# EAGLE board MJoy16-C1_Key_Matrix (EAGLE 5.06)
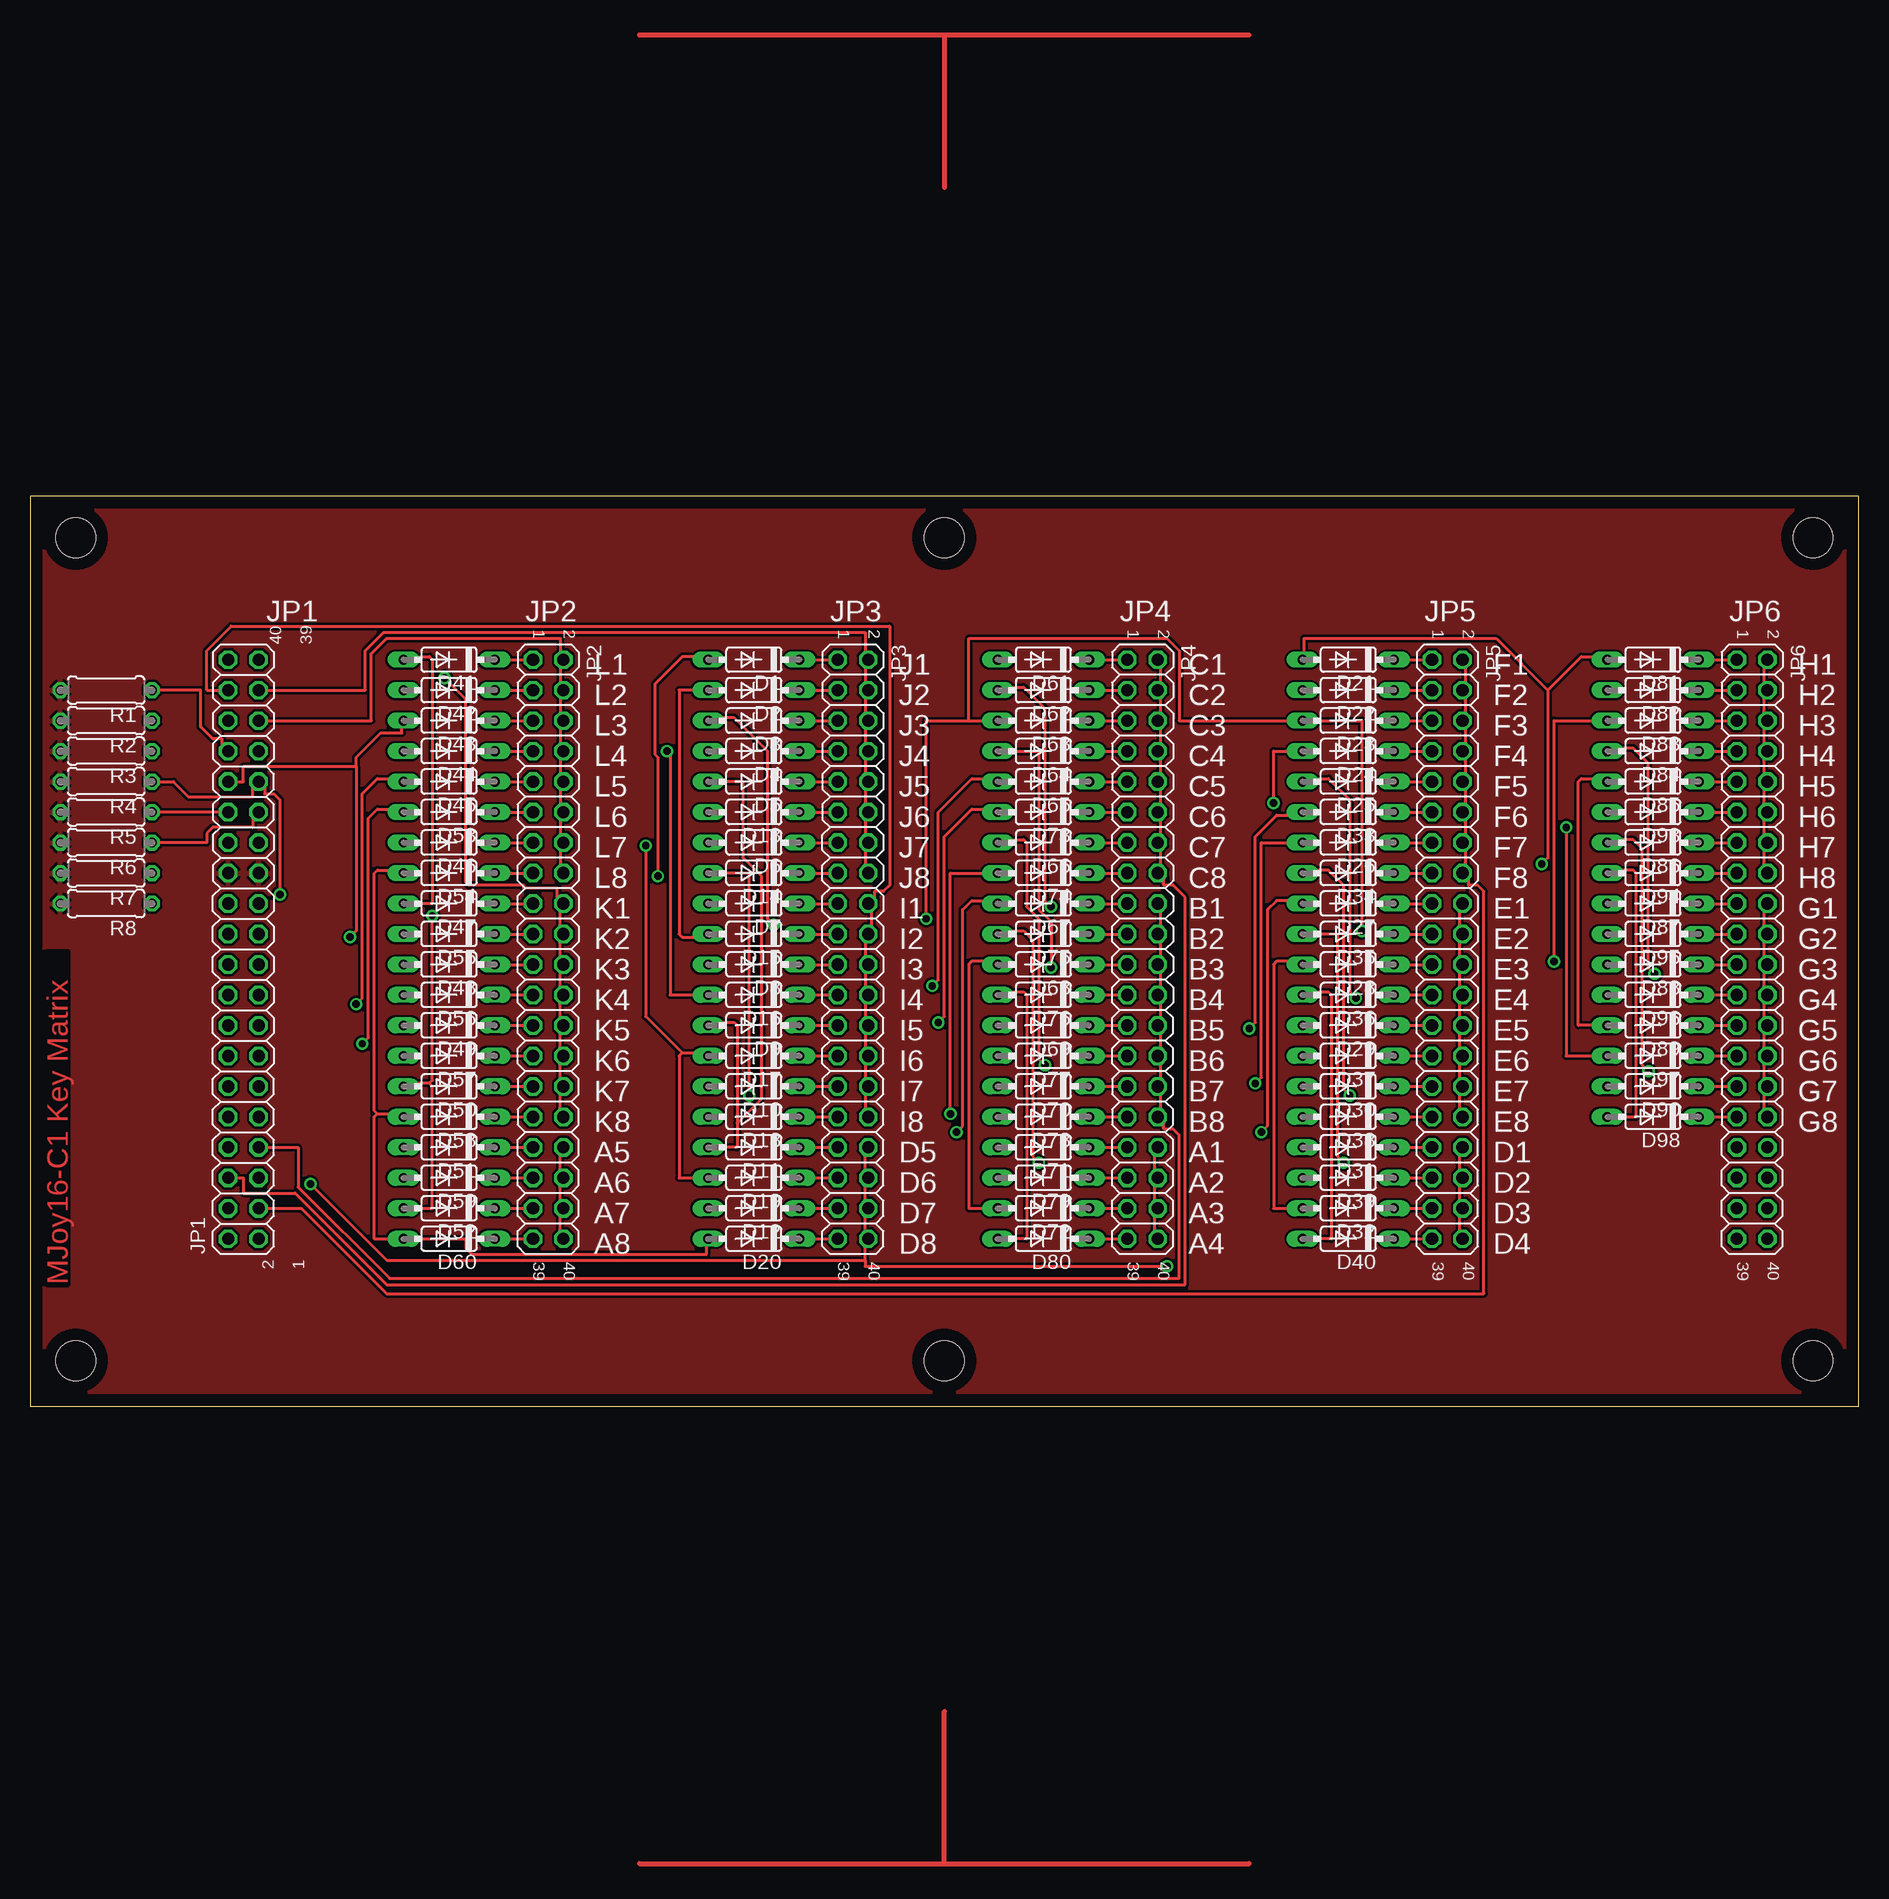
[diagram p0: board, top side]
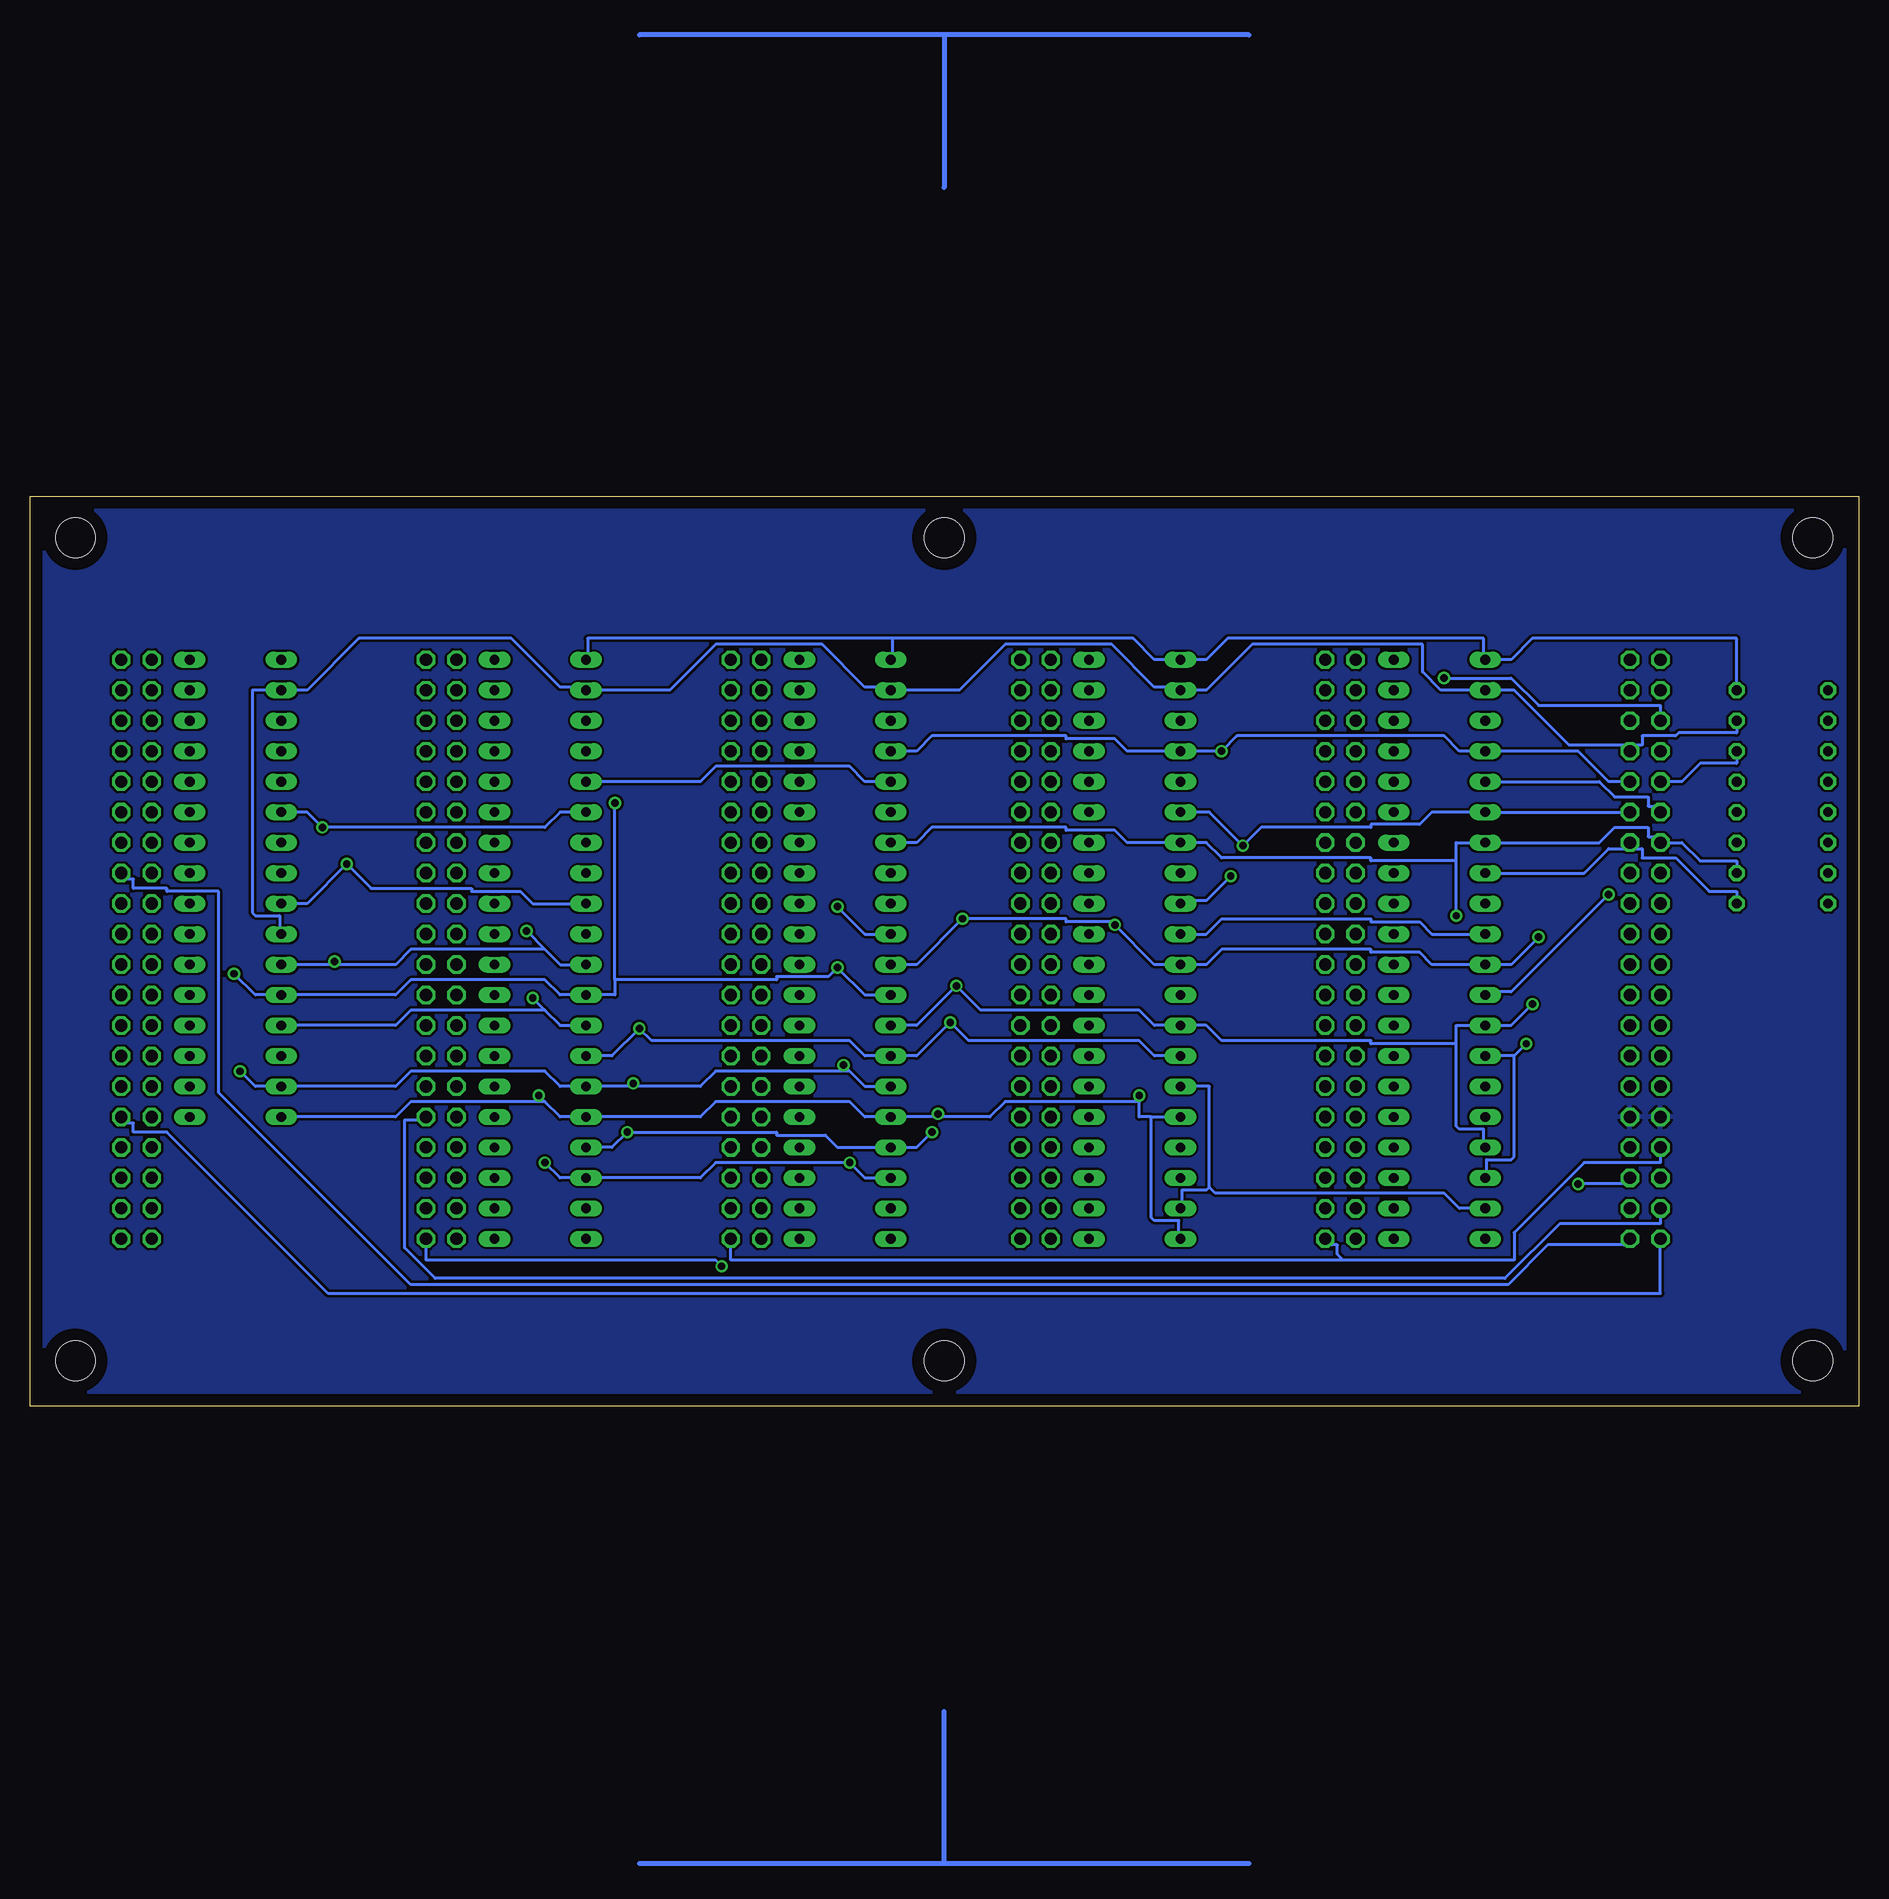
[diagram p1: board, bottom side, seen from below]

Size 152.38 x 75.87 mm. Coordinates in mm from the lower left corner, seen from the top.
Outline: 0,0 152.38,0 152.38,75.87 0,75.87 0,0
Copper layers (1*16): Top 0.035mm / dielectric 1.5mm / Bottom 0.035mm
Design rules "default": minimum track width 10mil, minimum drill 24mil, track to track 8mil, track to pad 8mil, pad to pad 8mil, via to via 8mil, smd to smd 8mil, copper to edge 40mil, drill to drill 8mil, minimum pad ring 10mil, minimum via ring 8mil, stop-mask expansion 4mil, vias tented up to drill 0mil, thermal gap 10mil

## Footprints (pad centres in the part's own frame; a part is rotated, then mirrored left to right if it is on the bottom)
DO35-7 = drill 0.813 long: A 3.81,0; C -3.81,0
2X20 = drill 1.016 octagon: 1 -24.13,-1.27; 2 -24.13,1.27; 3 -21.59,-1.27; 4 -21.59,1.27; 5 -19.05,-1.27; 6 -19.05,1.27; 7 -16.51,-1.27; 8 -16.51,1.27; 9 -13.97,-1.27; 10 -13.97,1.27; 11 -11.43,-1.27; 12 -11.43,1.27; 13 -8.89,-1.27; 14 -8.89,1.27; 15 -6.35,-1.27; 16 -6.35,1.27; 17 -3.81,-1.27; 18 -3.81,1.27; 19 -1.27,-1.27; 20 -1.27,1.27; 21 1.27,-1.27; 22 1.27,1.27; 23 3.81,-1.27; 24 3.81,1.27; 25 6.35,-1.27; 26 6.35,1.27; 27 8.89,-1.27; 28 8.89,1.27; 29 11.43,-1.27; 30 11.43,1.27; 31 13.97,-1.27; 32 13.97,1.27; 33 16.51,-1.27; 34 16.51,1.27; 35 19.05,-1.27; 36 19.05,1.27; 37 21.59,-1.27; 38 21.59,1.27; 39 24.13,-1.27; 40 24.13,1.27
0207/7 = drill 0.813 octagon: 1 -3.81,0; 2 3.81,0
STAND-OFF = hole 3.302: 0,0

## Placement (x,y rotation side)
D1  [DO35-7]  60.33,62.23 180 top
D2  [DO35-7]  60.33,59.69 180 top
D3  [DO35-7]  60.33,57.15 180 top
D4  [DO35-7]  60.33,54.61 180 top
D5  [DO35-7]  60.33,52.07 180 top
D6  [DO35-7]  60.33,46.99 180 top
D7  [DO35-7]  60.33,41.91 180 top
D8  [DO35-7]  60.33,36.83 180 top
D9  [DO35-7]  60.33,31.75 180 top
D10  [DO35-7]  60.33,26.67 180 top
D11  [DO35-7]  60.33,21.59 180 top
D12  [DO35-7]  60.33,16.51 180 top
D13  [DO35-7]  60.33,49.53 180 top
D14  [DO35-7]  60.33,44.45 180 top
D15  [DO35-7]  60.33,39.37 180 top
D16  [DO35-7]  60.33,34.29 180 top
D17  [DO35-7]  60.33,29.21 180 top
D18  [DO35-7]  60.33,24.13 180 top
D19  [DO35-7]  60.33,19.05 180 top
D20  [DO35-7]  60.33,13.97 180 top
D21  [DO35-7]  109.86,62.23 180 top
D22  [DO35-7]  109.86,59.69 180 top
D23  [DO35-7]  109.86,57.15 180 top
D24  [DO35-7]  109.86,54.61 180 top
D25  [DO35-7]  109.86,52.07 180 top
D26  [DO35-7]  109.86,46.99 180 top
D27  [DO35-7]  109.86,41.91 180 top
D28  [DO35-7]  109.86,36.83 180 top
D29  [DO35-7]  109.86,31.75 180 top
D30  [DO35-7]  109.86,26.67 180 top
D31  [DO35-7]  109.86,21.59 180 top
D32  [DO35-7]  109.86,16.51 180 top
D33  [DO35-7]  109.86,49.53 180 top
D34  [DO35-7]  109.86,44.45 180 top
D35  [DO35-7]  109.86,39.37 180 top
D36  [DO35-7]  109.86,34.29 180 top
D37  [DO35-7]  109.86,29.21 180 top
D38  [DO35-7]  109.86,24.13 180 top
D39  [DO35-7]  109.86,19.05 180 top
D40  [DO35-7]  109.86,13.97 180 top
D41  [DO35-7]  34.92,62.23 180 top
D42  [DO35-7]  34.92,59.69 180 top
D43  [DO35-7]  34.92,57.15 180 top
D44  [DO35-7]  34.92,54.61 180 top
D45  [DO35-7]  34.92,52.07 180 top
D46  [DO35-7]  34.92,46.99 180 top
D47  [DO35-7]  34.92,41.91 180 top
D48  [DO35-7]  34.92,36.83 180 top
D49  [DO35-7]  34.92,31.75 180 top
D50  [DO35-7]  34.92,26.67 180 top
D51  [DO35-7]  34.92,21.59 180 top
D52  [DO35-7]  34.92,16.51 180 top
D53  [DO35-7]  34.92,49.53 180 top
D54  [DO35-7]  34.92,44.45 180 top
D55  [DO35-7]  34.92,39.37 180 top
D56  [DO35-7]  34.92,34.29 180 top
D57  [DO35-7]  34.92,29.21 180 top
D58  [DO35-7]  34.92,24.13 180 top
D59  [DO35-7]  34.92,19.05 180 top
D60  [DO35-7]  34.92,13.97 180 top
D61  [DO35-7]  84.45,62.23 180 top
D62  [DO35-7]  84.45,59.69 180 top
D63  [DO35-7]  84.45,57.15 180 top
D64  [DO35-7]  84.45,54.61 180 top
D65  [DO35-7]  84.45,52.07 180 top
D66  [DO35-7]  84.45,46.99 180 top
D67  [DO35-7]  84.45,41.91 180 top
D68  [DO35-7]  84.45,36.83 180 top
D69  [DO35-7]  84.45,31.75 180 top
D70  [DO35-7]  84.45,26.67 180 top
D71  [DO35-7]  84.45,21.59 180 top
D72  [DO35-7]  84.45,16.51 180 top
D73  [DO35-7]  84.45,49.53 180 top
D74  [DO35-7]  84.45,44.45 180 top
D75  [DO35-7]  84.45,39.37 180 top
D76  [DO35-7]  84.45,34.29 180 top
D77  [DO35-7]  84.45,29.21 180 top
D78  [DO35-7]  84.45,24.13 180 top
D79  [DO35-7]  84.45,19.05 180 top
D80  [DO35-7]  84.45,13.97 180 top
D81  [DO35-7]  135.25,62.23 180 top
D82  [DO35-7]  135.25,59.69 180 top
D83  [DO35-7]  135.25,57.15 180 top
D84  [DO35-7]  135.25,54.61 180 top
D85  [DO35-7]  135.25,52.07 180 top
D86  [DO35-7]  135.25,46.99 180 top
D87  [DO35-7]  135.25,41.91 180 top
D88  [DO35-7]  135.25,36.83 180 top
D89  [DO35-7]  135.25,31.75 180 top
D90  [DO35-7]  135.25,26.67 180 top
D93  [DO35-7]  135.25,49.53 180 top
D94  [DO35-7]  135.25,44.45 180 top
D95  [DO35-7]  135.25,39.37 180 top
D96  [DO35-7]  135.25,34.29 180 top
D97  [DO35-7]  135.25,29.21 180 top
D98  [DO35-7]  135.25,24.13 180 top
JP1  [2X20]  17.78,38.1 90 top
JP2  [2X20]  43.18,38.1 270 top
JP3  [2X20]  68.58,38.1 270 top
JP4  [2X20]  92.71,38.1 270 top
JP5  [2X20]  118.11,38.1 270 top
JP6  [2X20]  143.51,38.1 270 top
R1  10K  [0207/7]  6.35,59.69 180 top
R2  10K  [0207/7]  6.35,57.15 180 top
R3  10K  [0207/7]  6.35,54.61 180 top
R4  10K  [0207/7]  6.35,52.07 180 top
R5  10K  [0207/7]  6.35,49.53 180 top
R6  10K  [0207/7]  6.35,46.99 180 top
R7  10K  [0207/7]  6.35,44.45 180 top
R8  10K  [0207/7]  6.35,41.91 180 top
U$1  [STAND-OFF]  3.81,3.81 0 top
U$2  [STAND-OFF]  3.81,72.39 0 top
U$3  [STAND-OFF]  148.59,3.81 0 top
U$4  [STAND-OFF]  148.59,72.39 0 top
U$5  [STAND-OFF]  76.2,72.39 0 top
U$6  [STAND-OFF]  76.2,3.81 0 top

## Library data of the parts
D1-D90 D93-D98 = diode
JP1-JP6 = pinhead
R1-R8 = resistor
U$1-U$6 = SparkFun

## Nets
GND: JP1.9 JP1.10
N$1: D1.C JP3.1
N$2: D2.C JP3.3
N$3: D3.C JP3.5
N$4: D4.C JP3.7
N$5: D5.C JP3.9
N$6: D13.C JP3.11
N$7: D6.C JP3.13
N$8: D14.C JP3.15
N$9: D7.C JP3.17
N$10: D15.C JP3.19
N$11: D8.C JP3.21
N$12: D16.C JP3.23
N$13: D9.C JP3.25
N$14: D17.C JP3.27
N$15: D10.C JP3.29
N$16: D18.C JP3.31
N$17: D11.C JP3.33
N$18: D19.C JP3.35
N$19: D12.C JP3.37
N$20: D20.C JP3.39
N$21: D41.C JP2.1
N$22: D21.C JP5.1
N$23: D22.C JP5.3
N$24: D23.C JP5.5
N$25: D24.C JP5.7
N$26: D25.C JP5.9
N$27: D33.C JP5.11
N$28: D26.C JP5.13
N$29: D34.C JP5.15
N$30: D27.C JP5.17
N$31: D35.C JP5.19
N$32: D28.C JP5.21
N$33: D36.C JP5.23
N$34: D29.C JP5.25
N$35: D37.C JP5.27
N$36: D30.C JP5.29
N$37: D38.C JP5.31
N$38: D31.C JP5.33
N$39: D39.C JP5.35
N$40: D32.C JP5.37
N$41: D40.C JP5.39
N$42: D42.C JP2.3
N$43: D43.C JP2.5
N$44: D44.C JP2.7
N$45: D45.C JP2.9
N$46: D53.C JP2.11
N$47: D46.C JP2.13
N$48: D54.C JP2.15
N$49: D47.C JP2.17
N$50: D55.C JP2.19
N$51: D48.C JP2.21
N$52: D56.C JP2.23
N$53: D49.C JP2.25
N$54: D57.C JP2.27
N$55: D50.C JP2.29
N$56: D58.C JP2.31
N$57: D51.C JP2.33
N$58: D59.C JP2.35
N$59: D52.C JP2.37
N$60: D60.C JP2.39
N$61: D61.C JP4.1
N$62: D62.C JP4.3
N$63: D63.C JP4.5
N$64: D64.C JP4.7
N$65: D65.C JP4.9
N$66: D73.C JP4.11
N$67: D66.C JP4.13
N$68: D74.C JP4.15
N$69: D67.C JP4.17
N$70: D75.C JP4.19
N$71: D68.C JP4.21
N$72: D76.C JP4.23
N$73: D69.C JP4.25
N$74: D77.C JP4.27
N$75: D70.C JP4.29
N$76: D78.C JP4.31
N$77: D71.C JP4.33
N$78: D79.C JP4.35
N$79: D72.C JP4.37
N$80: D80.C JP4.39
N$81: D81.C JP6.1
N$82: D82.C JP6.3
N$83: D83.C JP6.5
N$84: D84.C JP6.7
N$85: D85.C JP6.9
N$86: D93.C JP6.11
N$87: D86.C JP6.13
N$88: D94.C JP6.15
N$89: D87.C JP6.17
N$90: D95.C JP6.19
N$91: D88.C JP6.21
N$92: D96.C JP6.23
N$93: D89.C JP6.25
N$94: D97.C JP6.27
N$95: D90.C JP6.29
N$96: D98.C JP6.31
PB0: JP1.8 JP2.34 JP2.36 JP2.38 JP2.40 JP4.34 JP4.36 JP4.38 JP4.40
PB1: JP1.7 JP4.18 JP4.20 JP4.22 JP4.24 JP4.26 JP4.28 JP4.30 JP4.32
PB2: JP1.6 JP4.2 JP4.4 JP4.6 JP4.8 JP4.10 JP4.12 JP4.14 JP4.16
PB3: JP1.5 JP3.34 JP3.36 JP3.38 JP3.40 JP5.34 JP5.36 JP5.38 JP5.40
PB4: JP1.4 JP5.18 JP5.20 JP5.22 JP5.24 JP5.26 JP5.28 JP5.30 JP5.32
PB5: JP1.3 JP5.2 JP5.4 JP5.6 JP5.8 JP5.10 JP5.12 JP5.14 JP5.16
PB6: JP1.2 JP6.18 JP6.20 JP6.22 JP6.24 JP6.26 JP6.28 JP6.30 JP6.32
PB7: JP1.1 JP6.2 JP6.4 JP6.6 JP6.8 JP6.10 JP6.12 JP6.14 JP6.16
PC0: D1.A D7.A D21.A D27.A D31.A D41.A D47.A D61.A D67.A D71.A D81.A D87.A JP1.34 R1.1
PC1: D2.A D15.A D22.A D35.A D39.A D42.A D55.A D62.A D75.A D79.A D82.A D95.A JP1.33 R2.1
PC2: D3.A D8.A D23.A D28.A D32.A D43.A D48.A D63.A D68.A D72.A D83.A D88.A JP1.32 R3.1
PC3: D4.A D16.A D24.A D36.A D40.A D44.A D56.A D64.A D76.A D80.A D84.A D96.A JP1.31 R4.1
PC4: D5.A D9.A D11.A D25.A D29.A D45.A D49.A D51.A D65.A D69.A D85.A D89.A JP1.30 R5.1
PC5: D13.A D17.A D19.A D33.A D37.A D53.A D57.A D59.A D73.A D77.A D93.A D97.A JP1.29 R6.1
PC6: D6.A D10.A D12.A D26.A D30.A D46.A D50.A D52.A D66.A D70.A D86.A D90.A JP1.28 R7.1
PC7: D14.A D18.A D20.A D34.A D38.A D54.A D58.A D60.A D74.A D78.A D94.A D98.A JP1.27 R8.1
PD4: JP1.38 JP3.18 JP3.20 JP3.22 JP3.24 JP3.26 JP3.28 JP3.30 JP3.32
PD5: JP1.37 JP3.2 JP3.4 JP3.6 JP3.8 JP3.10 JP3.12 JP3.14 JP3.16
PD6: JP1.36 JP2.18 JP2.20 JP2.22 JP2.24 JP2.26 JP2.28 JP2.30 JP2.32
PD7: JP1.35 JP2.2 JP2.4 JP2.6 JP2.8 JP2.10 JP2.12 JP2.14 JP2.16
VCC: JP1.25 JP1.26 R1.2 R2.2 R3.2 R4.2 R5.2 R6.2 R7.2 R8.2

## Tracks (layer width: path | path; a pad name or v marks a point on that pad's centre or on a via)
GND
  pour Bottom: 0,0 152.4,0 152.4,76.2 0,76.2
N$1
  Top 0.254: JP3.1 64.26,62.23 D1.C
N$2
  Top 0.254: JP3.3 64.26,59.69 D2.C
N$3
  Top 0.254: JP3.5 64.26,57.15 D3.C
N$4
  Top 0.254: JP3.7 64.26,54.61 D4.C
N$5
  Top 0.254: JP3.9 64.26,52.07 D5.C
N$6
  Top 0.254: JP3.11 64.26,49.53 D13.C
N$7
  Top 0.254: JP3.13 64.26,46.99 D6.C
N$8
  Top 0.254: JP3.15 64.26,44.45 D14.C
N$9
  Top 0.254: JP3.17 64.26,41.91 D7.C
N$10
  Top 0.254: JP3.19 64.26,39.37 D15.C
N$11
  Top 0.254: JP3.21 64.26,36.83 D8.C
N$12
  Top 0.254: JP3.23 64.26,34.29 D16.C
N$13
  Top 0.254: JP3.25 64.26,31.75 D9.C
N$14
  Top 0.254: JP3.27 64.26,29.21 D17.C
N$15
  Top 0.254: JP3.29 64.26,26.67 D10.C
N$16
  Top 0.254: JP3.31 64.26,24.13 D18.C
N$17
  Top 0.254: JP3.33 64.26,21.59 D11.C
N$18
  Top 0.254: JP3.35 64.26,19.05 D19.C
N$19
  Top 0.254: JP3.37 64.26,16.51 D12.C
N$20
  Top 0.254: JP3.39 64.26,13.97 D20.C
N$21
  Top 0.254: JP2.1 38.86,62.23 D41.C
N$22
  Top 0.254: JP5.1 113.79,62.23 D21.C
N$23
  Top 0.254: JP5.3 113.79,59.69 D22.C
N$24
  Top 0.254: JP5.5 113.79,57.15 D23.C
N$25
  Top 0.254: JP5.7 113.79,54.61 D24.C
N$26
  Top 0.254: JP5.9 113.79,52.07 D25.C
N$27
  Top 0.254: JP5.11 113.79,49.53 D33.C
N$28
  Top 0.254: JP5.13 113.79,46.99 D26.C
N$29
  Top 0.254: JP5.15 113.79,44.45 D34.C
N$30
  Top 0.254: JP5.17 113.79,41.91 D27.C
N$31
  Top 0.254: JP5.19 113.79,39.37 D35.C
N$32
  Top 0.254: JP5.21 113.79,36.83 D28.C
N$33
  Top 0.254: JP5.23 113.79,34.29 D36.C
N$34
  Top 0.254: JP5.25 113.79,31.75 D29.C
N$35
  Top 0.254: JP5.27 113.79,29.21 D37.C
N$36
  Top 0.254: JP5.29 113.79,26.67 D30.C
N$37
  Top 0.254: JP5.31 113.79,24.13 D38.C
N$38
  Top 0.254: JP5.33 113.79,21.59 D31.C
N$39
  Top 0.254: JP5.35 113.79,19.05 D39.C
N$40
  Top 0.254: JP5.37 113.79,16.51 D32.C
N$41
  Top 0.254: JP5.39 113.79,13.97 D40.C
N$42
  Top 0.254: JP2.3 38.86,59.69 D42.C
N$43
  Top 0.254: JP2.5 38.86,57.15 D43.C
N$44
  Top 0.254: JP2.7 38.86,54.61 D44.C
N$45
  Top 0.254: JP2.9 38.86,52.07 D45.C
N$46
  Top 0.254: JP2.11 38.86,49.53 D53.C
N$47
  Top 0.254: JP2.13 38.86,46.99 D46.C
N$48
  Top 0.254: JP2.15 38.86,44.45 D54.C
N$49
  Top 0.254: JP2.17 38.86,41.91 D47.C
N$50
  Top 0.254: JP2.19 38.86,39.37 D55.C
N$51
  Top 0.254: JP2.21 38.86,36.83 D48.C
N$52
  Top 0.254: JP2.23 38.86,34.29 D56.C
N$53
  Top 0.254: JP2.25 38.86,31.75 D49.C
N$54
  Top 0.254: JP2.27 38.86,29.21 D57.C
N$55
  Top 0.254: JP2.29 38.86,26.67 D50.C
N$56
  Top 0.254: JP2.31 38.86,24.13 D58.C
N$57
  Top 0.254: JP2.33 38.86,21.59 D51.C
N$58
  Top 0.254: JP2.35 38.86,19.05 D59.C
N$59
  Top 0.254: JP2.37 38.86,16.51 D52.C
N$60
  Top 0.254: JP2.39 38.86,13.97 D60.C
N$61
  Top 0.254: JP4.1 88.39,62.23 D61.C
N$62
  Top 0.254: JP4.3 88.39,59.69 D62.C
N$63
  Top 0.254: JP4.5 88.39,57.15 D63.C
N$64
  Top 0.254: JP4.7 88.39,54.61 D64.C
N$65
  Top 0.254: JP4.9 88.39,52.07 D65.C
N$66
  Top 0.254: JP4.11 88.39,49.53 D73.C
N$67
  Top 0.254: JP4.13 88.39,46.99 D66.C
N$68
  Top 0.254: JP4.15 88.39,44.45 D74.C
N$69
  Top 0.254: JP4.17 88.39,41.91 D67.C
N$70
  Top 0.254: JP4.19 88.39,39.37 D75.C
N$71
  Top 0.254: JP4.21 88.39,36.83 D68.C
N$72
  Top 0.254: JP4.23 88.39,34.29 D76.C
N$73
  Top 0.254: JP4.25 88.39,31.75 D69.C
N$74
  Top 0.254: JP4.27 88.39,29.21 D77.C
N$75
  Top 0.254: JP4.29 88.39,26.67 D70.C
N$76
  Top 0.254: JP4.31 88.39,24.13 D78.C
N$77
  Top 0.254: JP4.33 88.39,21.59 D71.C
N$78
  Top 0.254: JP4.35 88.39,19.05 D79.C
N$79
  Top 0.254: JP4.37 88.39,16.51 D72.C
N$80
  Top 0.254: JP4.39 88.39,13.97 D80.C
N$81
  Top 0.254: JP6.1 139.19,62.23 D81.C
N$82
  Top 0.254: JP6.3 139.19,59.69 D82.C
N$83
  Top 0.254: JP6.5 139.19,57.15 D83.C
N$84
  Top 0.254: JP6.7 139.19,54.61 D84.C
N$85
  Top 0.254: JP6.9 139.19,52.07 D85.C
N$86
  Top 0.254: JP6.11 139.19,49.53 D93.C
N$87
  Top 0.254: JP6.13 139.19,46.99 D86.C
N$88
  Top 0.254: JP6.15 139.19,44.45 D94.C
N$89
  Top 0.254: JP6.17 139.19,41.91 D87.C
N$90
  Top 0.254: JP6.19 139.19,39.37 D95.C
N$91
  Top 0.254: JP6.21 139.19,36.83 D88.C
N$92
  Top 0.254: JP6.23 139.19,34.29 D96.C
N$93
  Top 0.254: JP6.25 139.19,31.75 D89.C
N$94
  Top 0.254: JP6.27 139.19,29.21 D97.C
N$95
  Top 0.254: JP6.29 139.19,26.67 D90.C
N$96
  Top 0.254: JP6.31 139.19,24.13 D98.C
N$97
  Top 0.406: 50.8,114.3 76.2,114.3 | 76.2,114.3 101.6,114.3 | 76.2,114.3 76.2,101.6
N$98
  Top 0.406: 50.8,-38.1 76.2,-38.1 | 76.2,-38.1 101.6,-38.1 | 76.2,-38.1 76.2,-25.4
N$99
  Bottom 0.406: 50.8,114.3 76.2,114.3 | 76.2,114.3 101.6,114.3 | 76.2,114.3 76.2,101.6
N$100
  Bottom 0.406: 50.8,-38.1 76.2,-38.1 | 76.2,-38.1 101.6,-38.1 | 76.2,-38.1 76.2,-25.4
PB0
  Top 0.254: JP4.40 93.73,14.22 93.73,16.26 | 93.73,16.26 JP4.38 93.73,16.26 | 93.73,18.8 JP4.36 93.73,18.8 | 93.73,16.26 93.73,18.8 | JP4.34 93.73,21.34 93.73,18.8 | JP2.40 44.2,14.22 44.2,16.26 | 44.2,16.26 JP2.38 44.2,16.26 | 44.2,18.8 JP2.36 44.2,18.8 | 44.2,16.26 44.2,18.8 | JP2.34 44.2,21.34 44.2,18.8
  Bottom 0.254: JP1.8 16.51,20.32 22.86,20.32 28.7,14.48 28.7,12.19 42.93,12.19 | 42.93,12.19 43.43,12.7 43.43,13.46 43.94,13.46 JP2.40 | JP4.40 93.98,12.19 42.93,12.19
PB1
  Top 0.254: JP1.7 22.35,21.59 22.35,18.29 29.97,10.67 95.76,10.67 95.76,22.61 95.25,23.11 94.49,23.11 94.49,23.62 94.23,23.88 | 94.23,23.88 JP4.32 94.23,23.88 | 94.23,26.42 JP4.30 94.23,26.42 | 94.23,23.88 94.23,26.42 | 94.23,28.96 JP4.28 94.23,28.96 | 94.23,26.42 94.23,28.96 | 94.23,31.5 JP4.26 94.23,31.5 | 94.23,28.96 94.23,31.5 | 94.23,34.04 JP4.24 94.23,34.04 | 94.23,31.5 94.23,34.04 | 94.23,36.58 JP4.22 94.23,36.58 | 94.23,34.04 94.23,36.58 | 94.23,39.12 JP4.20 94.23,39.12 | 94.23,36.58 94.23,39.12 | JP4.18 94.23,41.66 94.23,39.12
PB2
  Top 0.254: JP1.6 17.78,19.05 17.78,17.78 22.1,17.78 29.72,10.16 96.27,10.16 96.27,42.42 95.25,43.43 94.49,43.43 94.49,43.94 94.23,44.2 | 94.23,44.2 JP4.16 94.23,44.2 | 94.23,46.74 JP4.14 94.23,46.74 | 94.23,44.2 94.23,46.74 | 94.23,49.28 JP4.12 94.23,49.28 | 94.23,46.74 94.23,49.28 | 94.23,51.82 JP4.10 94.23,51.82 | 94.23,49.28 94.23,51.82 | 94.23,54.36 JP4.8 94.23,54.36 | 94.23,51.82 94.23,54.36 | 94.23,56.9 JP4.6 94.23,56.9 | 94.23,54.36 94.23,56.9 | 94.23,59.44 JP4.4 94.23,59.44 | 94.23,56.9 94.23,59.44 | JP4.2 94.23,61.98 94.23,59.44
PB3  (via drill 0.61)
  Top 0.254: JP5.40 119.13,14.22 119.13,16.26 | 119.13,16.26 JP5.38 119.13,16.26 | 119.13,18.8 JP5.36 119.13,18.8 | 119.13,16.26 119.13,18.8 | JP5.34 119.13,21.34 119.13,18.8 | 69.6,14.22 JP3.40 69.6,14.22 | 69.6,14.22 69.6,16.26 | 69.6,16.26 JP3.38 69.6,16.26 | v23.37,18.54 29.72,12.19 69.6,12.19 | 69.6,12.19 69.6,14.22 | 69.6,18.8 JP3.36 69.6,18.8 | 69.6,16.26 69.6,18.8 | JP3.34 69.6,21.34 69.6,18.8 | v94.74,11.68 69.6,11.68 69.6,12.19
  Bottom 0.254: JP1.5 19.56,18.54 v23.37,18.54 | JP5.40 119.38,12.19 95.25,12.19 v94.74,11.68
PB4
  Top 0.254: 119.13,28.96 119.13,26.92 JP5.30 119.13,26.42 119.13,24.38 JP5.32 | 119.13,28.96 JP5.28 119.13,28.96 | 119.13,31.5 JP5.26 119.13,31.5 | 119.13,28.96 119.13,31.5 | 119.13,34.04 JP5.24 119.13,34.04 | 119.13,31.5 119.13,34.04 | 119.13,36.58 JP5.22 119.13,36.58 | 119.13,34.04 119.13,36.58 | 119.13,39.12 JP5.20 119.13,39.12 | 119.13,36.58 119.13,39.12 | JP5.18 119.13,41.66 119.13,39.12
  Bottom 0.254: JP1.4 16.51,15.24 24.89,15.24 29.46,10.67 118.62,10.67 121.16,13.21 121.16,23.88 119.63,23.88 JP5.32
PB5
  Top 0.254: JP1.3 22.61,16.51 29.72,9.4 121.16,9.4 121.16,42.93 120.65,43.43 119.89,43.43 119.89,43.94 119.63,44.2 | 119.63,44.2 JP5.16 119.63,44.2 | 119.63,46.74 JP5.14 119.63,46.74 | 119.63,44.2 119.63,46.74 | 119.63,49.28 JP5.12 119.63,49.28 | 119.63,46.74 119.63,49.28 | 119.63,51.82 JP5.10 119.63,51.82 | 119.63,49.28 119.63,51.82 | 119.63,54.36 JP5.8 119.63,54.36 | 119.63,51.82 119.63,54.36 | 119.63,56.9 JP5.6 119.63,56.9 | 119.63,54.36 119.63,56.9 | 119.63,59.44 JP5.4 119.63,59.44 | 119.63,56.9 119.63,59.44 | JP5.2 119.63,61.98 119.63,59.44
PB6
  Top 0.254: 144.53,28.96 144.53,26.92 JP6.30 144.53,26.42 144.53,24.38 JP6.32 | 144.53,28.96 JP6.28 144.53,28.96 | 144.53,31.5 JP6.26 144.53,31.5 | 144.53,28.96 144.53,31.5 | 144.53,34.04 JP6.24 144.53,34.04 | 144.53,31.5 144.53,34.04 | 144.53,36.58 JP6.22 144.53,36.58 | 144.53,34.04 144.53,36.58 | 144.53,39.12 JP6.20 144.53,39.12 | 144.53,36.58 144.53,39.12 | JP6.18 144.53,41.66 144.53,39.12
  Bottom 0.254: JP1.2 16.51,9.4 127.51,9.4 140.97,22.86 143.76,22.86 143.76,23.62 144.27,23.62 JP6.32
PB7
  Top 0.254: 144.53,49.28 144.53,47.24 JP6.14 144.53,46.74 144.53,44.7 JP6.16 | 144.53,49.28 JP6.12 144.53,49.28 | 144.53,51.82 JP6.10 144.53,51.82 | 144.53,49.28 144.53,51.82 | 144.53,54.36 JP6.8 144.53,54.36 | 144.53,51.82 144.53,54.36 | 144.53,56.9 JP6.6 144.53,56.9 | 144.53,54.36 144.53,56.9 | 144.53,59.44 JP6.4 144.53,59.44 | 144.53,56.9 144.53,59.44 | JP6.2 144.53,61.98 144.53,59.44
  Bottom 0.254: JP1.1 19.56,13.46 25.91,13.46 29.21,10.16 120.65,10.16 136.65,26.16 136.65,42.93 140.97,42.93 140.97,43.18 143.76,43.18 143.76,43.94 144.27,43.94 JP6.16
PC0  (via drill 0.61)
  Top 0.254: v77.22,22.86 77.72,23.37 77.72,41.4 78.49,42.16 80.52,42.16 80.52,41.91 D67.A | v102.62,22.86 103.12,23.37 103.12,41.4 103.89,42.16 105.92,42.16 105.92,41.91 D27.A | R1.1 14.22,59.69 14.22,56.64 15.24,55.63 16,55.63 16,55.12 JP1.34 | D47.A 31.24,41.91 33.53,41.91 33.53,62.23 33.27,62.48 31.24,62.48 31.24,62.23 D41.A | v125.98,45.21 126.49,45.72 126.49,59.69 | 126.49,59.69 129.29,62.48 131.32,62.48 131.32,62.23 D81.A | v52.32,44.2 52.32,54.1 52.07,54.36 52.07,60.2 54.36,62.48 56.39,62.48 56.39,62.23 D1.A | 126.49,59.69 122.17,64.01 106.17,64.01 106.17,62.23 D21.A
  Bottom 0.254: v77.22,22.86 78.49,21.59 80.52,21.59 D71.A 80.77,21.59 85.09,21.59 86.11,22.61 90.17,22.61 90.17,22.86 v102.62,22.86 103.89,21.59 105.92,21.59 D31.A | R1.1 10.16,64.01 27.18,64.01 28.96,62.23 30.99,62.23 D41.A 31.24,62.23 31.24,64.01 52.58,64.01 54.36,62.23 56.39,62.23 D1.A 56.64,62.23 58.67,62.23 60.45,64.01 80.52,64.01 | D87.A 131.32,41.91 129.29,41.91 v125.98,45.21 123.95,43.18 115.57,43.18 115.57,42.93 111.51,42.93 110.49,41.91 106.17,41.91 D27.A | v52.32,44.2 54.36,42.16 56.13,42.16 56.39,41.91 D7.A | 80.52,64.01 80.52,62.23 D61.A | 80.52,64.01 105.92,64.01 105.92,62.23 D21.A
PC1  (via drill 0.61)
  Top 0.254: v84.07,20.32 83.57,20.83 83.57,38.86 82.8,39.62 80.77,39.62 80.77,39.37 D75.A | v109.47,20.32 108.97,20.83 108.97,39.37 106.17,39.37 D35.A | D2.A 56.39,59.69 54.1,59.69 54.1,39.37 54.36,39.12 56.39,39.12 56.39,39.37 D15.A | v85.09,41.66 84.58,42.16 84.58,58.17 82.8,59.94 80.77,59.94 80.77,59.69 D62.A
  Bottom 0.254: D95.A 131.57,39.37 131.57,40.89 133.6,40.89 133.86,41.15 133.86,59.69 131.57,59.69 D82.A 131.32,59.69 129.29,59.69 124.97,64.01 112.27,64.01 108.2,59.94 106.43,59.94 106.17,59.69 D22.A 105.92,59.69 99.06,59.69 95.25,63.5 86.36,63.5 82.8,59.94 81.03,59.94 80.77,59.69 D62.A 80.52,59.69 74.93,59.69 71.12,63.5 62.23,63.5 58.67,59.94 56.9,59.94 56.64,59.69 D2.A 56.39,59.69 54.36,59.69 50.55,63.5 36.32,63.5 36.32,61.21 34.8,59.69 31.24,59.69 D42.A 30.99,59.69 28.7,59.69 24.13,55.12 18.54,55.12 | D79.A 80.77,19.05 82.8,19.05 v84.07,20.32 95.25,20.32 96.52,19.05 105.92,19.05 D39.A 106.17,19.05 108.2,19.05 v109.47,20.32 | R2.1 10.16,56.13 14.99,56.13 15.24,55.88 18.03,55.88 18.03,55.12 18.54,55.12 | 18.54,55.12 JP1.33 18.54,55.12 | D55.A 31.24,39.37 35.56,39.37 36.58,40.39 40.64,40.39 40.64,40.64 53.09,40.64 54.36,39.37 56.39,39.37 D15.A | v85.09,41.66 82.8,39.37 80.77,39.37 D75.A
PC2  (via drill 0.61)
  Top 0.254: D32.A 105.92,16.51 103.63,16.51 103.63,36.83 103.89,37.08 105.92,37.08 105.92,36.83 D28.A | v111,39.62 111,57.15 106.17,57.15 D23.A 105.92,57.15 95.76,57.15 95.76,62.99 94.74,64.01 78.23,64.01 78.23,57.15 | v127,37.08 127,57.15 131.32,57.15 D83.A | v26.67,39.12 27.18,39.62 27.18,53.34 | 27.18,53.34 27.18,54.1 29.21,56.13 30.99,56.13 30.99,57.15 D43.A | JP1.32 17.78,52.07 17.78,53.34 27.18,53.34 | v61.98,40.13 61.47,40.64 61.47,54.61 58.67,57.4 56.64,57.4 56.64,57.15 D3.A | D72.A 80.52,16.51 78.23,16.51 78.23,36.83 78.49,37.08 80.52,37.08 80.52,36.83 D68.A | 78.23,57.15 74.68,57.15 v74.68,40.64 | 78.23,57.15 80.52,57.15 D63.A
  Bottom 0.254: 109.47,38.1 108.2,36.83 106.17,36.83 D28.A | v111,39.62 109.47,38.1 | 127,36.83 121.92,36.83 120.65,38.1 109.47,38.1 | 127,36.83 131.32,36.83 D88.A | 127,36.83 v127,37.08 | R3.1 10.16,53.59 13.21,53.59 14.73,52.07 JP1.32 | v26.67,39.12 28.96,36.83 30.99,36.83 D48.A 31.24,36.83 35.56,36.83 36.58,37.85 40.64,37.85 40.64,38.1 53.09,38.1 54.36,36.83 56.39,36.83 D8.A 56.64,36.83 58.67,36.83 v61.98,40.13 61.98,40.39 66.04,40.39 66.04,40.64 v74.68,40.64 78.49,36.83 80.52,36.83 D68.A
PC3  (via drill 0.61)
  Top 0.254: v53.09,54.61 53.34,54.36 53.34,34.29 56.39,34.29 D16.A | v20.83,42.67 20.83,50.55 20.32,51.05 19.56,51.05 19.56,51.56 JP1.31 18.54,51.56 18.54,50.8 13.21,50.8 11.94,52.07 R4.1 | D80.A 80.77,13.97 83.06,13.97 83.06,34.29 82.8,34.54 80.77,34.54 80.77,34.29 D76.A | v85.09,36.58 85.09,40.39 84.07,41.4 84.07,54.61 80.77,54.61 D64.A | v135.38,36.07 134.87,36.58 134.87,53.59 133.6,54.86 131.57,54.86 131.57,54.61 D84.A | D40.A 106.17,13.97 108.46,13.97 108.46,34.29 108.2,34.54 106.17,34.54 106.17,34.29 D36.A | v103.63,50.29 103.63,54.61 105.92,54.61 D24.A
  Bottom 0.254: v20.83,42.67 28.96,34.54 30.73,34.54 30.99,34.29 D56.A | JP1.31 20.83,52.07 23.37,54.61 30.99,54.61 D44.A 31.24,54.61 33.27,54.61 34.54,55.88 51.82,55.88 v53.09,54.61 56.39,54.61 D4.A 56.64,54.61 60.96,54.61 61.98,55.63 66.04,55.63 66.04,55.88 77.22,55.88 78.49,54.61 80.52,54.61 D64.A | D76.A 80.77,34.29 82.8,34.29 v85.09,36.58 85.85,35.81 90.17,35.81 90.17,35.56 103.63,35.56 | v135.38,36.07 133.6,34.29 131.57,34.29 D96.A 131.32,34.29 121.92,34.29 120.65,35.56 109.47,35.56 108.2,34.29 106.17,34.29 D36.A 105.92,34.29 103.63,34.29 103.63,35.56 | 103.63,35.56 v103.63,50.29
PC4  (via drill 0.61)
  Top 0.254: JP1.30 R5.1 | v27.18,33.53 27.69,34.04 27.69,51.05 28.96,52.32 30.99,52.32 30.99,52.07 D45.A | D89.A 131.32,31.75 129.03,31.75 129.03,52.07 129.29,52.32 131.32,52.32 131.32,52.07 D85.A | v110.49,34.04 109.98,34.54 109.98,50.55 108.2,52.32 106.17,52.32 106.17,52.07 D25.A | v75.18,35.05 75.69,35.56 75.69,49.53 78.49,52.32 80.52,52.32 80.52,52.07 D65.A | 58.93,23.62 58.93,31.75 58.67,32 56.64,32 56.64,31.75 D9.A | 58.93,23.62 58.93,21.59 56.64,21.59 D11.A | 58.93,23.62 60.96,25.65 60.96,44.2 59.44,45.72 59.44,52.07 56.64,52.07 D5.A
  Bottom 0.254: 33.53,30.23 33.53,31.75 31.24,31.75 D49.A 30.99,31.75 28.96,31.75 v27.18,33.53 | 33.53,30.23 33.53,23.37 33.27,23.11 31.24,23.11 31.24,21.59 D51.A | JP1.30 17.02,50.04 17.53,50.04 17.53,50.8 20.32,50.8 21.59,52.07 30.99,52.07 D45.A | v110.49,34.04 109.47,33.02 | 109.47,33.02 108.2,31.75 106.17,31.75 D29.A | 109.47,33.02 120.65,33.02 121.92,31.75 131.32,31.75 D89.A | D69.A 80.52,31.75 78.49,31.75 v75.18,35.05 73.15,33.02 59.94,33.02 58.67,31.75 56.64,31.75 D9.A 56.39,31.75 54.36,31.75 53.09,30.48 40.64,30.48 40.64,30.23 33.53,30.23 | D25.A 105.92,52.07 96.52,52.07 95.25,53.34 84.07,53.34 82.8,52.07 80.77,52.07 D65.A
PC5  (via drill 0.61)
  Top 0.254: R6.1 14.73,46.99 14.73,47.75 15.24,48.26 18.54,48.26 18.54,49.02 JP1.29 | v27.69,30.23 28.19,30.73 28.19,49.02 28.96,49.78 30.99,49.78 30.99,49.53 D53.A | v128.02,48.26 128.02,29.21 131.32,29.21 D97.A | v101.6,31.5 102.11,32 102.11,47.5 103.89,49.28 105.92,49.28 105.92,49.53 D33.A | v75.69,32 76.2,32.51 76.2,47.5 78.49,49.78 80.52,49.78 80.52,49.53 D73.A | 54.36,29.46 54.1,29.21 54.1,19.05 56.39,19.05 D19.A | 54.36,29.46 56.39,29.46 56.39,29.21 D17.A | v51.31,46.74 51.31,32.51 54.36,29.46
  Bottom 0.254: 28.7,29.21 28.7,20.83 28.96,20.57 30.99,20.57 30.99,19.05 D59.A | 28.7,29.21 30.99,29.21 D57.A | JP1.29 30.99,49.53 D53.A 31.24,49.53 35.56,49.53 36.58,48.51 40.64,48.51 40.64,48.26 49.78,48.26 v51.31,46.74 54.1,49.53 56.39,49.53 D13.A | 28.7,29.21 v27.69,30.23 | D93.A 131.32,49.53 129.29,49.53 v128.02,48.26 109.47,48.26 108.2,49.53 106.17,49.53 D33.A | D37.A 105.92,29.21 103.89,29.21 v101.6,31.5 100.58,30.48 84.07,30.48 82.8,29.21 80.77,29.21 D77.A 80.52,29.21 78.49,29.21 v75.69,32 74.17,30.48 59.94,30.48 58.67,29.21 56.64,29.21 D17.A
PC6  (via drill 0.61)
  Top 0.254: 33.27,26.92 33.53,26.67 33.53,16.51 31.24,16.51 D52.A | 33.27,26.92 31.24,26.92 31.24,26.67 D50.A | 33.27,26.92 33.53,27.18 v33.53,40.89 | v134.87,27.94 134.37,28.45 134.37,46.48 133.6,47.24 131.57,47.24 131.57,46.99 D86.A | v84.58,28.45 84.07,28.96 84.07,40.64 83.06,41.66 83.06,46.99 82.8,47.24 80.77,47.24 80.77,46.99 D66.A | v102.11,26.92 102.62,27.43 102.62,46.99 105.92,46.99 D26.A
  Bottom 0.254: 54.1,18.29 54.36,18.03 56.39,18.03 56.39,16.51 D12.A | 54.1,18.29 54.1,26.67 56.39,26.67 D10.A | R7.1 10.16,45.47 13.21,45.47 14.73,46.99 JP1.28 17.02,47.5 17.53,47.5 17.53,48.26 20.32,48.26 21.59,46.99 30.99,46.99 D46.A 31.24,46.99 33.53,46.99 33.53,45.47 | v33.53,40.89 33.53,45.47 | 54.1,18.29 53.59,17.78 34.54,17.78 33.27,16.51 31.24,16.51 D52.A | v134.87,27.94 133.6,26.67 131.57,26.67 D90.A 131.32,26.67 121.92,26.67 120.65,27.94 109.47,27.94 108.2,26.67 106.17,26.67 D30.A 105.92,26.67 102.11,26.67 | v84.58,28.45 84.07,27.94 | 84.07,27.94 82.8,26.67 80.77,26.67 D70.A | 102.11,26.67 96.52,26.67 95.25,27.94 84.07,27.94 | D66.A 80.52,46.99 78.49,46.99 77.22,48.26 66.04,48.26 66.04,48.01 61.98,48.01 60.96,46.99 56.64,46.99 D6.A 56.39,46.99 54.36,46.99 53.09,45.72 40.64,45.72 40.64,45.47 33.53,45.47 | 102.11,26.67 v102.11,26.92
PC7  (via drill 0.61)
  Top 0.254: 28.96,24.38 28.7,24.13 28.7,13.97 30.99,13.97 D60.A 31.24,13.97 36.32,13.97 36.32,13.21 36.83,12.7 56.39,12.7 56.39,13.97 D20.A | 28.96,24.38 30.99,24.38 30.99,24.13 D58.A | 28.96,24.38 28.7,24.64 28.7,44.45 28.96,44.7 30.99,44.7 30.99,44.45 D54.A | D98.A 131.57,24.13 133.86,24.13 133.86,44.45 133.6,44.7 131.57,44.7 131.57,44.45 D94.A | v109.98,25.91 109.47,26.42 109.47,43.43 108.2,44.7 106.17,44.7 106.17,44.45 D34.A | v59.94,25.91 59.94,44.45 56.64,44.45 D14.A | v76.71,24.38 76.71,44.45 80.52,44.45 D74.A
  Bottom 0.254: R8.1 10.16,42.93 12.45,42.93 15.24,45.72 18.03,45.72 18.03,46.48 18.54,46.48 | 18.54,46.48 JP1.27 18.54,46.48 | 18.54,46.48 20.83,46.48 22.86,44.45 30.99,44.45 D54.A | 109.47,25.4 v109.98,25.91 | 109.47,25.4 108.2,24.13 106.17,24.13 D38.A 105.92,24.13 96.52,24.13 95.25,25.4 84.07,25.4 82.8,24.13 80.77,24.13 D78.A 80.52,24.13 76.71,24.13 | 109.47,25.4 120.65,25.4 121.92,24.13 131.32,24.13 D98.A | 58.93,24.13 58.93,15.75 58.67,15.49 56.64,15.49 56.64,13.97 D20.A | 58.93,24.13 56.64,24.13 D18.A | 59.94,25.4 59.94,24.13 58.93,24.13 | 59.94,25.4 v59.94,25.91 | 76.71,24.13 72.39,24.13 71.12,25.4 59.94,25.4 | 76.71,24.13 v76.71,24.38
PD4
  Top 0.254: JP3.32 69.6,24.38 69.6,26.42 | 69.6,26.42 JP3.30 69.6,26.42 | 69.6,28.96 JP3.28 69.6,28.96 | 69.6,28.96 69.6,26.42 | 69.6,31.5 JP3.26 69.6,31.5 | 69.6,31.5 69.6,28.96 | 69.6,34.04 JP3.24 69.6,34.04 | 69.6,34.04 69.6,31.5 | 69.6,36.58 JP3.22 69.6,36.58 | 69.6,36.58 69.6,34.04 | 69.6,36.58 69.6,39.12 JP3.20 70.1,39.62 70.1,42.16 | JP1.38 14.73,59.69 14.73,62.99 16.76,65.02 71.63,65.02 71.63,43.43 71.12,42.93 70.36,42.93 70.36,42.42 70.1,42.16 | 70.1,42.16 JP3.18 70.1,42.16
PD5
  Top 0.254: JP3.16 69.6,44.7 69.6,46.74 | 69.6,46.74 JP3.14 69.6,46.74 | 69.6,49.28 JP3.12 69.6,49.28 | 69.6,49.28 69.6,46.74 | 69.6,51.82 JP3.10 69.6,51.82 | 69.6,51.82 69.6,49.28 | 69.6,54.36 JP3.8 69.6,54.36 | 69.6,54.36 69.6,51.82 | 69.6,54.36 69.6,56.9 JP3.6 69.6,57.4 69.6,59.94 | JP1.37 27.94,59.69 27.94,62.99 29.46,64.52 69.6,64.52 69.6,62.48 | 69.6,62.48 JP3.2 69.6,62.48 | 69.6,59.94 JP3.4 69.6,59.94 | 69.6,62.48 69.6,59.94
PD6  (via drill 0.61)
  Top 0.254: JP2.32 44.2,24.38 44.2,26.42 | 44.2,26.42 JP2.30 44.2,26.42 | 44.2,28.96 JP2.28 44.2,28.96 | 44.2,26.42 44.2,28.96 | 44.2,31.5 JP2.26 44.2,31.5 | 44.2,28.96 44.2,31.5 | 44.2,34.04 JP2.24 44.2,34.04 | 44.2,31.5 44.2,34.04 | 44.2,36.58 JP2.22 44.2,36.58 | 44.2,34.04 44.2,36.58 | 44.2,36.58 44.2,39.12 JP2.20 44.2,39.62 44.2,42.16 | v34.54,60.71 36.32,58.93 36.32,43.69 36.58,43.43 41.15,43.43 41.15,43.18 43.94,43.18 43.94,42.42 44.2,42.16 | 44.2,42.16 JP2.18 44.2,42.16
  Bottom 0.254: JP1.36 16.51,58.42 26.67,58.42 28.96,60.71 v34.54,60.71
PD7
  Top 0.254: JP2.16 44.2,44.7 44.2,46.74 | 44.2,46.74 JP2.14 44.2,46.74 | 44.2,49.28 JP2.12 44.2,49.28 | 44.2,49.28 44.2,46.74 | 44.2,51.82 JP2.10 44.2,51.82 | 44.2,51.82 44.2,49.28 | 44.2,54.36 JP2.8 44.2,54.36 | 44.2,54.36 44.2,51.82 | 44.2,54.36 44.2,56.9 JP2.6 44.2,57.4 44.2,59.94 | JP1.35 28.45,57.15 28.45,62.74 29.72,64.01 44.2,64.01 44.2,62.48 | 44.2,62.48 JP2.2 44.2,62.48 | 44.2,59.94 JP2.4 44.2,59.94 | 44.2,62.48 44.2,59.94
VCC
  pour Top: 0,0 152.4,0 152.4,76.2 0,76.2

## Text on the board
Top: MJoy16-C1 Key Matrix
tPlace: JP1 | JP2 | 1 | 2 | JP3 | 1 | 2 | JP4 | 1 | 2 | JP5 | 1 | 2 | JP6 | 1 | 2 | 40 | 39 | L1 | J1 | C1 | F1 | H1 | L2 | J2 | C2 | F2 | H2 | L3 | J3 | C3 | F3 | H3 | L4 | J4 | C4 | F4 | H4 | L5 | J5 | C5 | F5 | H5 | L6 | J6 | C6 | F6 | H6 | L7 | J7 | C7 | F7 | H7 | L8 | J8 | C8 | F8 | H8 | K1 | I1 | B1 | E1 | G1 | K2 | I2 | B2 | E2 | G2 | K3 | I3 | B3 | E3 | G3 | K4 | I4 | B4 | E4 | G4 | K5 | I5 | B5 | E5 | G5 | K6 | I6 | B6 | E6 | G6 | K7 | I7 | B7 | E7 | G7 | K8 | I8 | B8 | E8 | G8 | A5 | D5 | A1 | D1 | A6 | D6 | A2 | D2 | A7 | D7 | A3 | D3 | A8 | D8 | A4 | D4 | 39 | 40 | 39 | 40 | 39 | 40 | 39 | 40 | 39 | 40 | 2 | 1